# Altium PCB SoilMoistureSensorv2.PcbDoc
Units mm, origin at the board's own origin, x right, y up, seen from the top; angles counter-clockwise.
Board outline 58 x 58 mm, 2 copper layers (Top Layer, Bottom Layer); 48 components, 28 nets, 160 pads, 27 vias.
Unrouted connection lines stored in the file: 1.
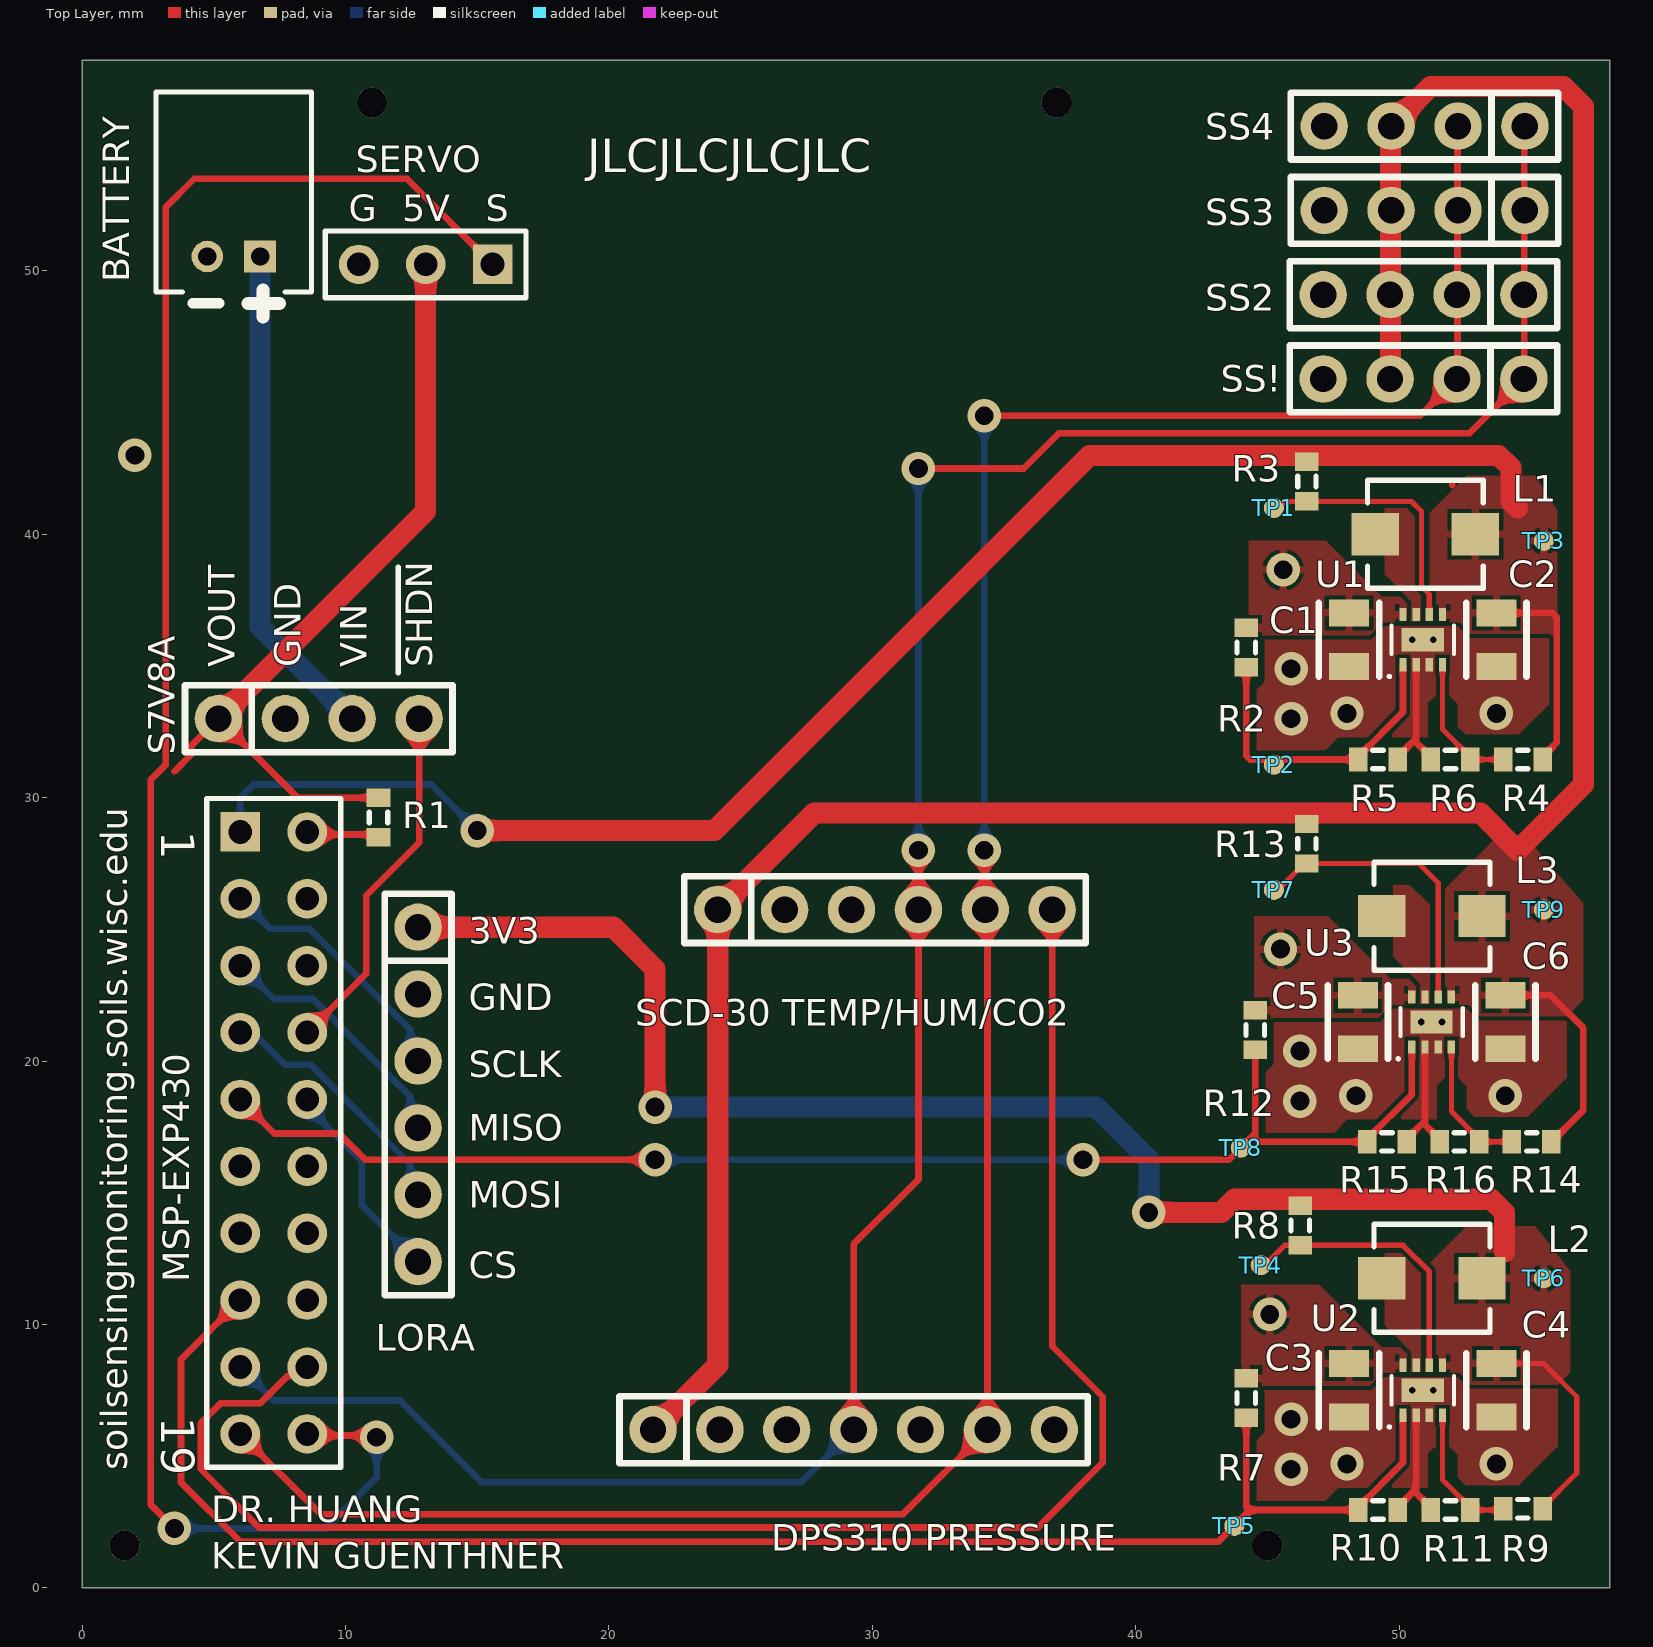
[diagram p0: Top Layer view]
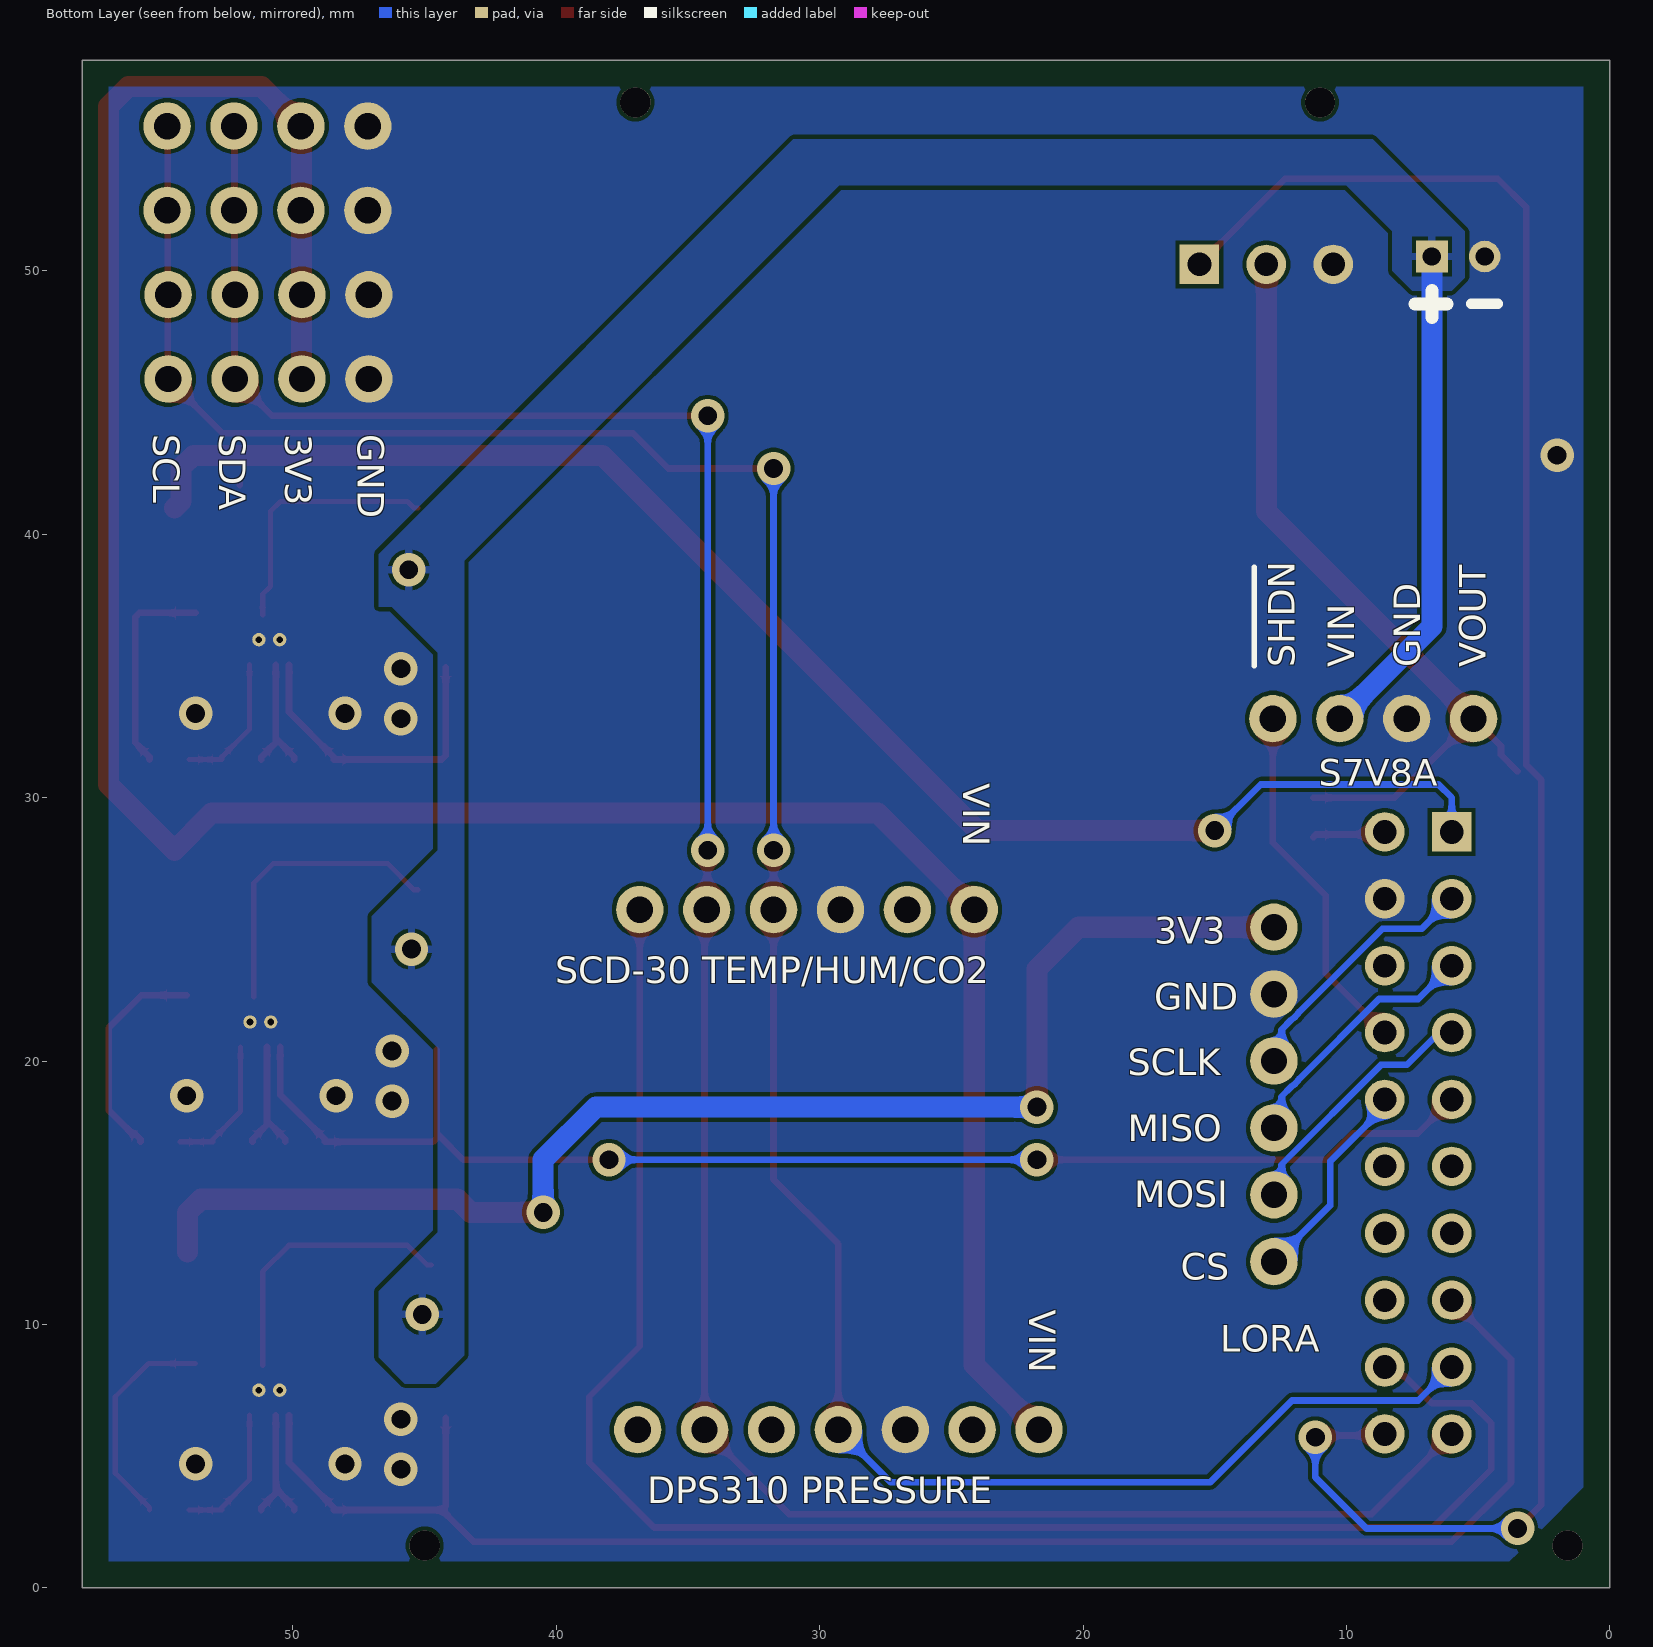
[diagram p1: Bottom Layer view, seen from below]
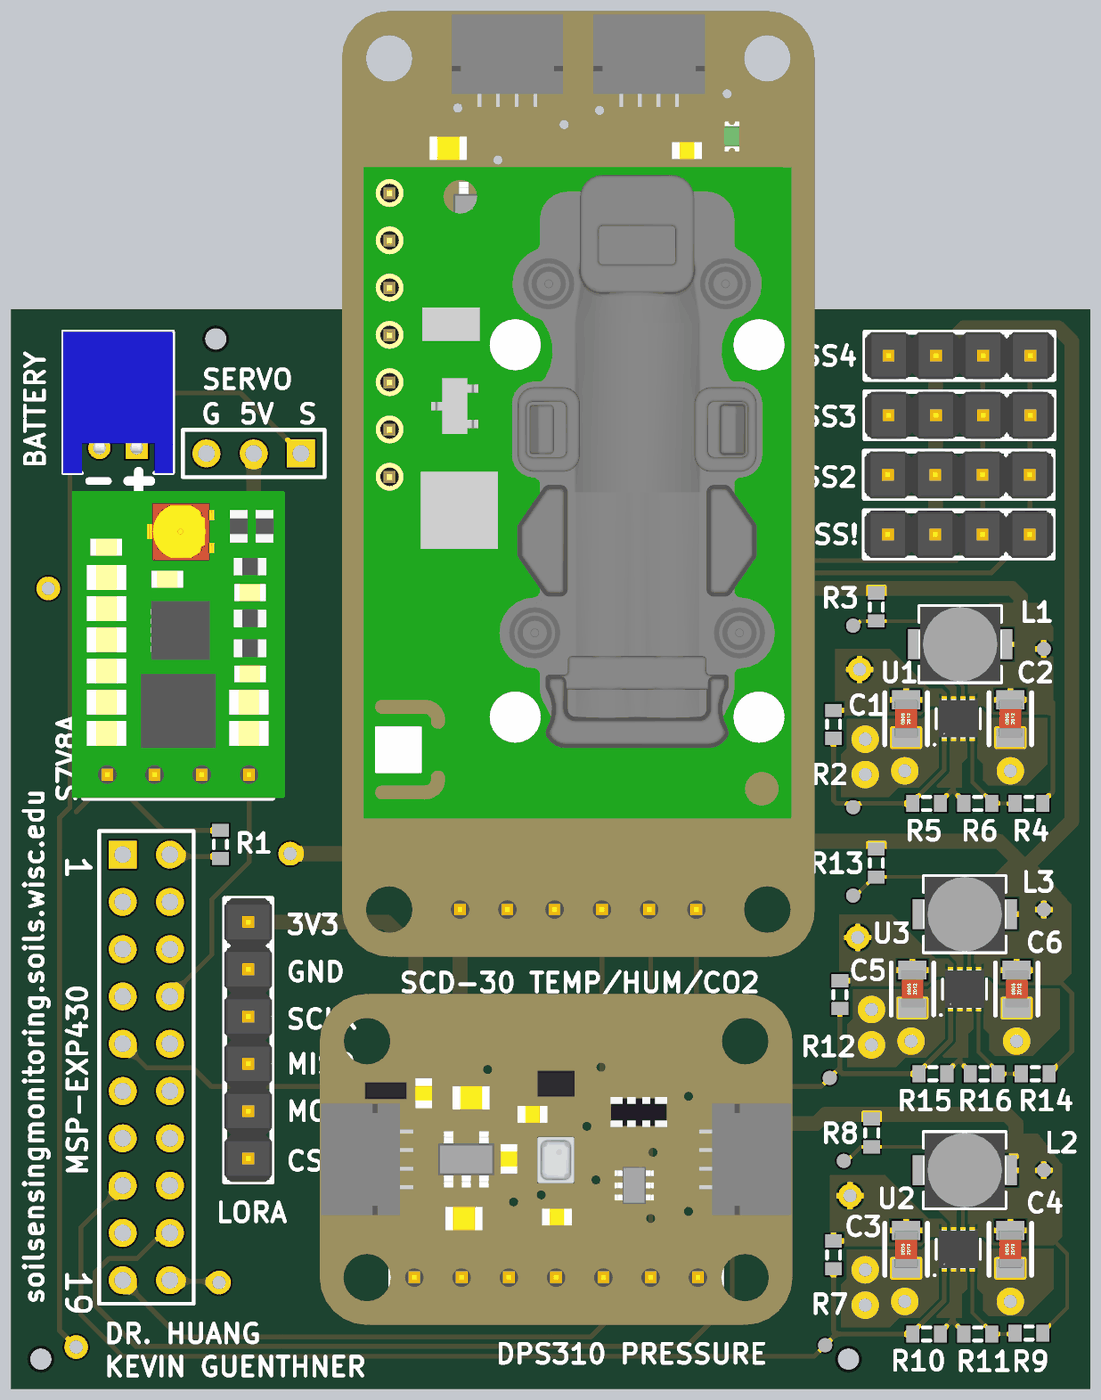
[diagram p2: 3D render of the assembled board from above, using the file's embedded part models]

## Layer stack, top to bottom
Top Solder: solder mask 0.0102, Solder Resist, Dk 3.5
Top Layer: signal copper 0.0356
Dielectric 1: dielectric 0.32, FR-4, Dk 4.8
Bottom Layer: signal copper 0.0356
Bottom Solder: solder mask 0.0102, Solder Resist, Dk 3.5

## Board outline
0,0 0,58 58,58 58,0

## Design rules (kind name [scope] priority, off if disabled: settings)
Clearance [All] p1: gap=0.152 ignorepadtopadclearanceinfootprint=FALSE
MinimumAnnularRing [All] p1: minimumring=0.127
MinimumSolderMaskSliver [All] p1: minsoldermaskwidth=0.11
PlaneClearance [All] p1: clearance=0.2
PolygonConnect PolygonConnect_2 [InNetClass('RELIEF_POWER')] p1: connectstyle=Relief reliefconductorwidth=0.3 reliefentries=4 polygonreliefangle="90 Angle" airgapwidth=0.15
PolygonConnect PolygonConnect_1 [InNetClass('POWER')] p2: connectstyle=Direct reliefconductorwidth=0.254 reliefentries=4 polygonreliefangle="90 Angle" airgapwidth=0.254
PolygonConnect [All] p3: connectstyle=Relief reliefconductorwidth=0.254 reliefentries=4 polygonreliefangle="90 Angle" airgapwidth=0.254
RoutingVias [All] p1: holewidth=0.711 width=1.27 viastyle="Through Hole" minholewidth=0.711 minwidth=1.27 maxholewidth=0.711 maxwidth=1.27
SilkToSilkClearance [All] p1: silktosilkclearance=0.125
SilkToSolderMaskClearance [IsPad] p1: minsilkscreentomaskgap=0.01 clearancetoexposedcopper=TRUE
SolderMaskExpansion [All] p1: expansion=0.102 istentingtop=FALSE
Width [All] p1: maxlimit=0.85 minlimit=0.152 preferedwidth=0.254
26 further rules are at their usual default settings.

## Classes and differential pairs
net class RELIEF_POWER: 3V3_LORA 3V3_MCU 3V3_SENSORS VBAT
net class POWER: 3V3_L_SW 3V3_M_SW 3V3_S_SW GND VBAT
component class SoilMoistureSensorv2: C1 C2 C3 C4 C5 C6 J2 J3 J9 L1 L2 L3 P1 P2 P3 P4 P6 P7 P8 R1 R2 R3 R4 R5 R6 R7 R8 R10 R11 R12 R13 R14 R15 R16 S7V8A TP9 U1 U2 U3

## Components (designator, comment, footprint, x,y, rotation, side; value= is the part's Value field where it differs from the comment)
BATTERY "Battery Connector" JST-S2B-PH-K-S_V 5.75,53 r180 top (schematic designator J2)
C1 "10µF" SMD-0805C 48.1,36 r0 top
C2 "22µF" SMD-0805C 53.7,36 r0 top
C3 "10µF" SMD-0805C 48.1,7.5 r0 top
C4 "22µF" SMD-0805C 53.7,7.5 r0 top
C5 "10µF" SMD-0805C 48.438,21.48 r0 top
C6 "22µF" SMD-0805C 54.038,21.48 r0 top
"DPS310 PRESSURE" "Header_7 - DPS310" "Pin Header DPS310" 21.67,6 r0 top (schematic designator P7)
L1 "IND 1.0uH" INDP4340X15N 51,40 r180 top value=1.0uH
L2 "IND 1.0uH" INDP4340X15N 51.25,11.75 r180 top value=1.0uH
L3 "IND 1.0uH" INDP4340X15N 51.25,25.5 r180 top value=1.0uH
LORA "Header_6 - LORA" "Pin Header LORA" 12.75,25.08 r270 top (schematic designator P8)
MSP-EXP430 "MSP_CONNECTOR_LEFT" HDR2X10 6,28.7 r270 top (schematic designator J3)
R1 "DNP" J1-0603 11.25,29.25 r270 top value=0
R2 "R10K" J1-0603 44.2,35.7 r90 top value=10k
R3 "R180K" J1-0603 46.5,42 r270 top value=180k
R4 "DNP" J1-0603 54.7,31.45 r0 top value=123
R5 "DNP" J1-0603 49.2,31.45 r180 top value=123
R6 "R_0" J1-0603 51.95,31.45 r0 top value=0
R7 "DNP" J1-0603 44.2,7.2 r90 top value=1K
R8 "R180K" J1-0603 46.25,13.75 r270 top value=180k
R9 "DNP" J1-0603 54.7,3 r0 top value=123
R10 "R10K" J1-0603 49.2,2.95 r180 top value=10k
R11 "R_0" J1-0603 51.95,2.95 r0 top value=0
R12 "DNP" J1-0603 44.538,21.18 r90 top value=123
R13 "R180K" J1-0603 46.5,28.25 r270 top value=180k
R14 "DNP" J1-0603 55.038,16.93 r0 top value=123
R15 "R10K" J1-0603 49.538,16.93 r180 top value=10k
R16 "R_0" J1-0603 52.288,16.93 r0 top value=0
S7V8A "Pololu S7V8" "Pin Header S7V8" 5.17,33 r0 top (schematic designator P5)
"SCD-30 TEMP/HUM/CO2" "Header_6 - SCD-30" "Pin Header SCD-30" 24.13,25.75 r0 top locked (schematic designator P6)
SERVO "SERVO_BUS" HDR1X3 15.58,50.25 r180 top (schematic designator J9)
SS2 "SEESAW_2" "Pin Header 1x4 TH Pitch 2.54mm" 54.74,49.1 r180 top (schematic designator P2)
SS3 "SEESAW_3" "Pin Header 1x4 TH Pitch 2.54mm" 54.78,52.3 r180 top (schematic designator P3)
SS4 "SEESAW_4" "Pin Header 1x4 TH Pitch 2.54mm" 54.78,55.5 r180 top (schematic designator P4)
SS! "SEESAW_1" "Pin Header 1x4 TH Pitch 2.54mm" 54.74,45.9 r180 top (schematic designator P1)
TP1 "TP" "Test Point" 45.25,41 r90 top
TP2 "TP" "Test Point" 45.25,31.25 r90 top
TP3 "TP" "Test Point" 55.5,39.75 r90 top
TP4 "TP" "Test Point" 44.75,12.25 r90 top
TP5 "TP" "Test Point" 43.749,2.35 r90 top
TP6 "TP" "Test Point" 55.5,11.75 r90 top
TP7 "TP" "Test Point" 45.25,26.5 r90 top
TP8 "TP" "Test Point" 43.995,16.707 r90 top
TP9 "TP" "Test Point" 55.5,25.75 r90 top
U1 "TPS62082DSGR" DSG8_1P6X0P9 50.9,36 r90 top
U2 "TPS62082DSGR" DSG8_1P6X0P9 50.9,7.5 r90 top
U3 "TPS62082DSGR" DSG8_1P6X0P9 51.238,21.48 r90 top

## Footprints (in the part's own frame and the unit in brackets; to place one, negate y for a bottom-side part, rotate by r counter-clockwise, add the part's x,y. Pads: shape width x height; smd on the part's side, far side on the other; paste and mask are expansions set on the pad)
DSG8_1P6X0P9 [mm]
  rect 0.5x0.28 smd paste-0.14 mask+0: 1(-0.95,0.75) 2(-0.95,0.25) 3(-0.95,-0.25) 4(-0.95,-0.75) 5(0.95,-0.75) 6(0.95,-0.25) 7(0.95,0.25) 8(0.95,0.75)
  rect 0.889x1.6 smd paste-0.787 mask-0.787: 9(0,0)
  round 0.508 hole 0.254: V(0,0.394) V(0,-0.394)
  Top Layer region: 0,-0.8 0,-0.8 0,-0.8 0,-0.8 0,-0.8 0,-0.8 0,-0.8 0,-0.8
  Top Layer region: 0,0.8 0,0.8 0,0.8 0,0.8 0,0.8 0,0.8 0,0.8 0,0.8
  silkscreen extent -1.45,-1.18 0.54,1.32, body extent -1.05,-1.05 1.05,1.05, height 0.54
HDR1X3 [mm] "Connector; Header; 3 Position"
  rect 1.5x1.5 hole 0.9: 1(0,0)
  round 1.5 hole 0.9: 2(2.54,0) 3(5.08,0)
  silkscreen extent -1.27,-1.27 6.35,1.27
HDR2X10 [mm] "Connector; Header; 10x2 Position"
  rect 1.5x1.5 hole 0.9: 1(0,0)
  round 1.5 hole 0.9: 2(0,2.54) 3(2.54,0) 4(2.54,2.54) 5(5.08,0) 6(5.08,2.54) 7(7.62,0) 8(7.62,2.54) 9(10.16,0) 10(10.16,2.54) 11(12.7,0) 12(12.7,2.54) 13(15.24,0) 14(15.24,2.54) 15(17.78,0) 16(17.78,2.54) 17(20.32,0) 18(20.32,2.54) 19(22.86,0) 20(22.86,2.54)
  silkscreen extent -1.27,-1.27 24.13,3.81
INDP4340X15N [mm] "Precision Wire Wound Inductor, 2-Leads, Body 4.30x4.00mm, IPC Medium Density"
  rect 1.8x1.6 smd: 1(-1.9,0) 2(1.9,0)
  silkscreen extent -2.2,-2.05 2.2,2.05, body extent -2.25,-2 2.25,2, height 1.6
J1-0603 [mm] "Chip Resistor, Body 1.6x0.8mm, IPC High Density"
  rect 0.7x0.9 smd: 1(-0.75,0) 2(0.75,0)
  silkscreen extent -0.2,-0.35 0.2,0.35, body extent -0.85,-0.48 0.85,0.48, height 0.9
JST-S2B-PH-K-S_V [mm] "THD, 2-Leads, Body 7.6x5.9mm, Pitch 2mm"
  rect 1.2x1.2 hole 0.7: 1(-1,2.45)
  round 1.2 hole 0.7: 2(1,2.45)
  silkscreen extent -2.95,-3.8 2.95,4.35, body extent -2.95,-3.8 2.95,3.8, height 4.8
"Pin Header 1x4 TH Pitch 2.54mm" [mm] "PinHeader 1x4 TH Pitch 2.54mm"
  round 1.8 hole 1: 1(0,0) 2(2.54,0) 3(5.08,0) 4(7.62,0)
  silkscreen extent -1.27,-1.27 8.89,1.27, body extent -1.27,-1.27 8.89,1.27, height 9.5
"Pin Header DPS310" [mm] "PinHeader 1x7 TH Pitch 2.54mm"
  round 1.8 hole 1: 1(0,0) 2(2.54,0) 3(5.08,0) 4(7.62,0) 5(10.16,0) 6(12.7,0) 7(15.24,0)
  silkscreen extent -1.27,-1.27 16.51,1.27, body extent -5.08,-2.56 20.32,15.22, height 7.53
"Pin Header LORA" [mm] "PinHeader 1x6 TH Pitch 2.54mm"
  round 1.8 hole 1: 1(0,0) 2(2.54,0) 3(5.08,0) 4(7.62,0) 5(10.16,0) 6(12.7,0)
  silkscreen extent -1.27,-1.27 13.97,1.27, body extent -1.27,-1.27 13.97,1.27, height 9.5
"Pin Header S7V8" [mm] "PinHeader 1x4 TH Pitch 2.54mm"
  round 1.8 hole 1: 1(0,0) 2(2.54,0) 3(5.08,0) 4(7.62,0)
  silkscreen extent -1.27,-1.27 8.89,1.27, body extent -1.91,-1.27 9.53,15.24, height 6.02
"Pin Header SCD-30" [mm] "PinHeader 1x6 TH Pitch 2.54mm"
  round 1.8 hole 1: 1(0,0) 2(2.54,0) 3(5.08,0) 4(7.62,0) 5(10.16,0) 6(12.7,0)
  silkscreen extent -1.27,-1.27 13.97,1.27, body extent -6.35,-2.54 19.05,48.26, height 11.57
SMD-0805C [mil]
  rect 60x40 smd: 1(0,40) 2(0,-40)
  silkscreen extent -45,-55 45,55, body extent -25,-39 25,39, height 35
"Test Point" [mil] "SMD Test Point"
  round 30 smd: 1(0,0)

## Part data
BATTERY: library part CMP-002-00030-2, "Male Header, Pitch 2 mm, 1 x 2 Position, Height 4.8 mm, Tail Length 3.4 mm, -25 to 85 degC, RoHS, Bulk", Case/Package=S2B-PH-K-S, Manufacturer="Japan Solderless Terminals", Max Operating Temperature=85°C, Min Operating Temperature=-25°C, Package Description="Male Header, Pitch 2 mm, 1 x 2 Position, Height 4.8 mm, Tail Length 3.4 mm", Connector Type=Header, Datasheet URL=http://www.jst-mfg.com/product/pdf/eng/ePH.pdf, Datasheet Version=Dec-12, Gender=Male, Mounting Technology=SM, Package Reference=S2B-PH-K-S, RoHS Compliant=Unknown
C1 C3 C5: library part GCJ21BR71A106KE01L, "CAP CER 10UF 10V X7R 0805", LCSC Part #=C440198, Manufacturer="Murata Electronics North America", Operating Temperature="-55°C ~ 125°C", Package / Case="0805 (2012 Metric)", Ratings=AEC-Q200, Temperature Coefficient=X7R, Tolerance=±10%, Voltage=10V, @ qty=0, Applications="Automotive, Boardflex Sensitive", Datasheets=http://www.murata.com/~/media/webrenewal/support/library/catalog/products/capacitor/mlcc/c03e.ashx, Digikey P/N=490-12646-1-ND, Factory Stock=0, Features="Soft Termination", Height - Seated (Max)=-, Image=//media.digikey.com/Renders/Murata%20Renders/0805%20(2012%20Metric)%20.85mm.jpg, Lead Spacing=-, Minimum Quantity=1, Mounting Type="Surface Mount, MLCC", Packaging="Cut Tape (CT)", Part Number=GCJ21BR71A106KE01L, Part Status=Active, Quantity Available=2702, Series=GCJ, Size / Dimension="0.079\" L x 0.049\" W (2.00mm x 1.25mm)", Thickness (Max)="0.057\" (1.45mm)", Unit Price (USD)=0.56
C2 C4 C6: library part GRT21BR61A226ME13L, "CAP CER 22UF 10V X5R 0805", LCSC Part #=C45783, Manufacturer="Murata Electronics North America", Operating Temperature="-55°C ~ 85°C", Package / Case="0805 (2012 Metric)", Ratings=AEC-Q200, Temperature Coefficient=X5R, Tolerance=±20%, Voltage=10V, @ qty=0, Applications=Automotive, Datasheets=http://search.murata.co.jp/Ceramy/image/img/A01X/G101/ENG/GRT21BR61A226ME13-01.pdf, Digikey P/N=490-12374-1-ND, Factory Stock=0, Features="Derating Recommended", Height - Seated (Max)=-, Image=//media.digikey.com/Renders/Murata%20Renders/GRT%20Series%200805(2012%20Metric).jpg, Lead Spacing=-, Lead Style=-, Minimum Quantity=1, Mounting Type="Surface Mount, MLCC", Packaging="Cut Tape (CT)", Part Number=GRT21BR61A226ME13L, Part Status=Active, Quantity Available=9088, Series=GRT, Size / Dimension="0.079\" L x 0.049\" W (2.00mm x 1.25mm)", Thickness (Max)="0.057\" (1.45mm)", Unit Price (USD)=0.58
"DPS310 PRESSURE": "Header, 7-Pin", LatestRevisionDate=17-Jul-2002, LatestRevisionNote="Re-released for DXP Platform.", Publisher="Altium Limited"
L1 L2 L3: "SLO0415S1R0MTT", Inductance=1uH, LCSC Part #=C325988, Manufacturer_Part_Number=XFL5030-102ME, Maximum DC Current=28A, Package / Case="5.48mm x 5.28mm x 3.1mm", Temperature="-40C ~ 125C", Tolerance=+-20%, Datasheet=https://www.mouser.com/datasheet/2/597/xfl5030-1223909.pdf, Height=3.1mm, Link=https://www.mouser.com/ProductDetail/Coilcraft/XFL5030-102MEB?qs=sGAEpiMZZMsg%252by3WlYCkUy0Se8nYOmwuY%252bO5URw9yeY%3d, Qualification=AEC-Q200, RefDes=RefDes, Type=DEV, Vendor=CoilCraft
LORA "SCD-30 TEMP/HUM/CO2": "Header, 6-Pin", LatestRevisionDate=17-Jul-2002, LatestRevisionNote="Re-released for DXP Platform.", Publisher="Altium Limited"
MSP-EXP430: library part "Header 10X2", "Header, 10-Pin, Dual row", LatestRevisionDate=17-Jul-2002, LatestRevisionNote="Re-released for DXP Platform.", Publisher="Altium Limited"
R1 R4 R5 R7 R9 R12 R14: library part Res3, "Resistor", LatestRevisionDate=29-May-2009, LatestRevisionNote="IPC-7351 Footprint Added.", PackageDescription="Chip Resistor", PackageReference=J1-0603, Published=8-Jun-2000, Publisher="Altium Limited"
R2 R10 R15: library part Res3, "Resistor", LCSC Part #=C25804, LatestRevisionDate=29-May-2009, LatestRevisionNote="IPC-7351 Footprint Added.", PackageDescription="Chip Resistor", PackageReference=J1-0603, Published=8-Jun-2000, Publisher="Altium Limited"
R3 R8 R13: library part Res3, "Resistor", LCSC Part #=C22827, LatestRevisionDate=29-May-2009, LatestRevisionNote="IPC-7351 Footprint Added.", PackageDescription="Chip Resistor", PackageReference=J1-0603, Published=8-Jun-2000, Publisher="Altium Limited"
R6 R11 R16: library part Res3, "Resistor", LCSC Part #=C21189, LatestRevisionDate=29-May-2009, LatestRevisionNote="IPC-7351 Footprint Added.", PackageDescription="Chip Resistor", PackageReference=J1-0603, Published=8-Jun-2000, Publisher="Altium Limited"
S7V8A: "Header, 4-Pin", LatestRevisionDate=17-Jul-2002, LatestRevisionNote="Re-released for DXP Platform.", Publisher="Altium Limited"
SERVO: library part "Header 3", "Header, 3-Pin", LatestRevisionDate=17-Jul-2002, LatestRevisionNote="Re-released for DXP Platform.", Publisher="Altium Limited"
SS2 SS3 SS4 SS!: library part "Header 4", "Header, 4-Pin", LatestRevisionDate=17-Jul-2002, LatestRevisionNote="Re-released for DXP Platform.", Publisher="Altium Limited"
TP1 TP2 TP3 TP4 TP5 TP6 TP7 TP8 TP9: "SMD TEST POINT"
U1 U2 U3: LCSC Part #=C485809

## Free pads (board coordinates)
  round 1.152 hole 1.152 unplated mask+0.148: 5(1.6,1.6) 5(11,56.4) 5(37,56.4) 5(45,1.6)

## Via types
v1: diameter 1.27, hole 0.711, Top Layer to Bottom Layer, 27 vias

## Nets (pads, with @x,y where several pads share a name; then routed paths per layer and width w, separated by ;. In a path a pad name is that pad's centre, name@x,y a point inside that pad or via, vN(x,y) a via of type N, cw(c..) or ccw(c..) an arc to the next point about the centre after c; other vN are vias at no path point)
3V3_L_FB: R9.1 R11.2 U2.4 | length 5.3
  Top Layer w0.2: U2.4 51.65,4.1 52.7,3.05 R11.2 R9.1@53.95,2.95
3V3_L_SW: L2.2 U2.7
3V3_LORA: C4.1 L2.1 LORA.1 R8.1 R9.2 TP6.1 U2.5 | length 60.3
  Top Layer w0.2: C4.1 55.484,8.516 56.75,7.25 56.75,4.35 55.45,3.05 R9.2@55.45,2.95
  Top Layer w0.8: LORA.1 20.17,25.08 21.75,23.5 v1(21.75,18.25) ; v1(40.5,14.25) 43.25,14.25 43.75,14.75 45.75,14.75 53.5,14.75 54,14.25 54,12.75
  Bottom Layer w0.8: v1(21.75,18.25) 38.5,18.25 40.5,16.25 v1(40.5,14.25)
3V3_LORA_EN: MSP-EXP430.15 R7.1 R10.2 TP5.1 U2.1 | length 61.7
  Top Layer w0.254: MSP-EXP430.15 3.75,8.67 3.75,4 6,1.75 43.149,1.75 44.349,2.95 ; R7.1 44.2,3.099 44.349,2.95 ; R10.2 44.349,2.95 ; R10.2@48.45,3.05 50.15,4.75 U2.1
3V3_LORA_PGOOD: R8.2 TP4.1 U2.6 | length 10.7
  Top Layer w0.2: TP4.1 44.9,12.25 45.65,13 45.75,13 50.157,13 51.15,12.007 U2.6
3V3_M_SW: L1.2 U1.7
3V3_M_VFB: R4.1 R6.2 U1.4 | length 5.3
  Top Layer w0.2: U1.4 51.65,32.6 52.7,31.55 R6.2 R4.1
3V3_MCU: C2.1 L1.1 MSP-EXP430.1 R3.1 R4.2 TP3.1 U1.5 | length 66.3
  Top Layer w0.254: 52.025,41.875 52.025,41.975 ; C2.1 55.835,37.016 55.984,36.867 55.984,32.084 55.45,31.55 R4.2
  Top Layer w0.8: v1(15,28.75) 24,28.75 38.25,43 53.781,43 54.25,42.531 54.25,41.25 54.5,41
  Bottom Layer w0.254: MSP-EXP430.1 6,30 6.5,30.5 13.25,30.5 v1(15,28.75)
3V3_MCU_EN: R2.1 R5.2 TP2.1 U1.1 | length 11.9
  Top Layer w0.254: R2.1 44.2,31.599 44.349,31.45 R5.2 ; R5.2@48.45,31.55 50.15,33.25 U1.1
3V3_MCU_PGOOD: R3.2 TP1.1 U1.6 | length 9.9
  Top Layer w0.2: TP1.1 45.398,41 45.648,41.25 R3.2 50.475,41.25 50.85,40.875 50.85,38.025 51.15,37.725 U1.6
3V3_S_FB: R14.1 R16.2 U3.4 | length 5.3
  Top Layer w0.2: U3.4 51.988,18.08 53.038,17.03 R16.2 R14.1
3V3_S_SW: L3.2 U3.7
3V3_SENSORS: "DPS310 PRESSURE.1" "SCD-30 TEMP/HUM/CO2.1" C6.1 L3.1 R13.1 R14.2 SS2.3 SS3.3 SS4.3 SS!.3 TP9.1 U3.5 | length 108.7
  Top Layer w0.254: C6.1 55.754,22.496 57,21.25 57,18.142 56.111,17.253 56.011,17.253 55.788,17.03 R14.2
  Top Layer w0.8: 21.67,6 24.13,8.46 24.13,25.75 27.794,29.414 44.25,29.414 53.086,29.414 54.5,28 57,30.5 57,56.25 56.25,57 51.2,57 SS4.3 49.68,55.48 49.68,52.3 49.68,49.1 49.68,45.92 SS!.3
3V3_SENSORS_EN: MSP-EXP430.9 R12.1 R15.2 TP8.1 U3.1 | length 51.8
  Top Layer w0.254: MSP-EXP430.9 7.29,17.25 9.75,17.25 10.75,16.25 v1(21.75,16.25) ; v1(38,16.25) 43.538,16.25 44.453,17.164 44.538,17.25 ; R12.1 44.538,17.25 ; R15.2 44.687,16.93 44.538,17.079 44.538,17.25 ; R15.2@48.788,17.03 50.488,18.73 U3.1
  Bottom Layer w0.254: v1(21.75,16.25) v1(38,16.25)
3V3_SENSORS_PGOOD: R13.2 TP7.1 U3.6 | length 11.3
  Top Layer w0.2: TP7.1 45.4,26.5 46.4,27.5 R13.2 50.75,27.5 51.488,26.762 U3.6
5V: R1.1 S7V8A.1 SERVO.2 | length 30.5
  Top Layer w0.254: 3.5,31 4.131,31.631 4.131,31.961 S7V8A.1 8.17,30 R1.1
  Top Layer w0.8: S7V8A.1 13.04,40.87 SERVO.2
CS: LORA.6 MSP-EXP430.10 | length 7.9
  Bottom Layer w0.254: MSP-EXP430.10 8.54,18.257 10.616,16.181 10.616,14.514 LORA.6
GND: "DPS310 PRESSURE.3" "SCD-30 TEMP/HUM/CO2.3" BATTERY.2 C1.2 C2.2 C3.2 C4.2 C5.2 C6.2 LORA.2 MSP-EXP430.4 R5.1 R6.1 R10.1 R11.1 R15.1 R16.1 S7V8A.2 SERVO.3 SS2.4 SS3.4 SS4.4 SS!.4 U1.2 U1.3 U1.9 U1.V U2.2 U2.3 U2.9 U2.V U3.2 U3.3 U3.9 U3.V | length 14.8
  Top Layer w0.254: R10.1 49.95,3.05 50.65,3.75 ; R5.1 49.95,31.55 50.65,32.25 ; R15.1 50.288,17.03 50.988,17.73 ; U2.2 50.65,3.75 ; U1.2 50.65,32.25 ; U3.2 50.988,17.73 ; R11.1 51.2,3.05 50.65,3.6 50.65,3.75 ; R6.1 51.2,31.55 50.65,32.1 50.65,32.25 ; R16.1 51.538,17.03 50.988,17.58 50.988,17.73
  other v1: 45.9,4.5 48.025,4.7 53.7,4.7 45.9,6.4 46.238,18.48 48.363,18.68 54.038,18.68 46.238,20.38 45.9,33 48.025,33.2 53.7,33.2 45.9,34.9 2,43
MISO: LORA.4 MSP-EXP430.5 | length 9.8
  Bottom Layer w0.254: MSP-EXP430.5 7.268,22.352 8.763,22.352 11.768,19.347 ccw(c12.75,20) 12.097,19.018 12.454,18.661 12.454,17.756 LORA.4
MOSI: LORA.5 MSP-EXP430.7 | length 9.8
  Bottom Layer w0.254: MSP-EXP430.7 6.238,20.842 6.717,20.842 7.705,19.854 8.682,19.854 12.454,16.082 12.454,15.216 LORA.5
NetJ3_2: MSP-EXP430.2 R1.2 | length 2.8
  Top Layer w0.254: MSP-EXP430.2 8.64,28.6 11.15,28.6 R1.2
SCD30_RDY: "SCD-30 TEMP/HUM/CO2.6" MSP-EXP430.18 | length 64.7
  Top Layer w0.254: MSP-EXP430.18 8.203,8.38 7.862,8.039 7.789,8.039 6.75,7 5.25,7 4.5,6.25 4.5,4.5 6.714,2.286 36.286,2.286 38.75,4.75 38.75,7.25 36.83,9.17 36.83,25.75
SCL: "DPS310 PRESSURE.4" "SCD-30 TEMP/HUM/CO2.4" MSP-EXP430.17 SS2.1 SS3.1 SS4.1 SS!.1 | length 97.5
  Top Layer w0.254: 29.29,6 29.29,13.045 31.75,15.505 v1(31.75,28) ; v1(31.75,42.5) 35.75,42.5 37.086,43.836 52.676,43.836 54.76,45.92 54.76,55.48 SS4.1
  Bottom Layer w0.254: MSP-EXP430.17 7.268,7.112 12.065,7.112 15.177,4 27.29,4 29.29,6 ; v1(31.75,28) v1(31.75,42.5)
SCLK: LORA.3 MSP-EXP430.3 | length 9.8
  Bottom Layer w0.254: MSP-EXP430.3 7.141,25.019 8.636,25.019 11.768,21.887 ccw(c12.75,22.54) 12.097,21.558 12.454,21.201 12.454,20.296 LORA.3
SDA: "DPS310 PRESSURE.6" "SCD-30 TEMP/HUM/CO2.5" MSP-EXP430.19 SS2.2 SS3.2 SS4.2 SS!.2 | length 97.7
  Top Layer w0.254: MSP-EXP430.19 9.046,2.794 31.164,2.794 34.37,6 34.37,25.67 34.29,25.75 34.27,25.77 34.27,27.98 v1(34.25,28) ; v1(34.25,44.5) 50.8,44.5 SS!.2 52.22,45.92 52.22,49.1 52.22,55.48 SS4.2
  Bottom Layer w0.254: v1(34.25,28) v1(34.25,44.5)
SERVO_GPIO_EN: MSP-EXP430.8 S7V8A.4 | length 13.7
  Top Layer w0.254: MSP-EXP430.8 10.784,23.324 10.784,26.284 12.79,28.29 S7V8A.4
SERVO_PWM: MSP-EXP430.20 SERVO.1 | length 77.7
  Top Layer w0.254: v1(3.5,2.25) 2.595,3.155 2.595,30.67 3.164,31.239 3.164,52.414 4.25,53.5 12.33,53.5 SERVO.1 ; MSP-EXP430.20 8.602,5.778 11.113,5.778 v1(11.176,5.715)
  Bottom Layer w0.254: v1(3.5,2.25) 9.235,2.25 11.176,4.191 v1(11.176,5.715)
VBAT: BATTERY.1 C1.1 C3.1 C5.1 R2.2 R7.2 R12.2 S7V8A.3 U1.8 U2.8 U3.8 | length 19
  Bottom Layer w0.8: BATTERY.1 6.75,45.25 6.75,36.5 S7V8A.3
  other v1: 45.086,10.379 45.5,24.25 45.6,38.65
pads on no net: "DPS310 PRESSURE.2" "DPS310 PRESSURE.5" "DPS310 PRESSURE.7" "SCD-30 TEMP/HUM/CO2.2" MSP-EXP430.6 MSP-EXP430.11 MSP-EXP430.12 MSP-EXP430.13 MSP-EXP430.14 MSP-EXP430.16

## Polygon pours and split planes (outlines as drawn)
VBAT on Bottom Layer "VBAT_BOT" (solid, pour order 0): 45.75,7.75 46.75,8.75 46.75,11.25 44.5,13.5 44.5,20.5 47,23 47,25.5 44.5,28 44.5,35.5 46.25,37.25 46.75,37.25 46.75,39.25 31,55 9,55 5.5,51.5 5.5,49.75 6,49.25 7.5,49.25 8.25,50 8.25,51.5 10,53.25 29.25,53.25 43.5,39 43.5,8.825 44.575,7.75
GND on Bottom Layer "GND_L02_P015" (solid, pour order 15): 1,3.81 3.81,1 57,1 57,57 1,57
VBAT on Top Layer "VBAT" (solid, pour order 3): 50.037,9.137 50.338,8.838 50.338,8.388 49.5,7.55 44,7.55 44,11.5 46.975,11.5 49.338,9.138
GND on Top Layer "PS_GND" (solid, pour order 11): 52.225,32.7 52.525,32.4 54.55,32.4 56.025,33.875 56.025,36.05 52.675,36.05 52.225,36.5 49.45,36.5 48.95,36 44.9,36 44.9,34.4 44.6,34.1 44.6,31.8 47.2,31.8 47.7,32.3 51.1,32.3 51.1,33.6 51.393,33.875 51.907,33.875 52.225,33.557
VBAT on Top Layer "VBAT" (solid, pour order 12): 50.037,37.637 50.338,37.338 50.338,36.888 49.5,36.05 44.288,36.05 44.288,39.75 47.225,39.75 49.338,37.638
3V3_MCU on Top Layer "3V3_LORA" (solid, pour order 14): 51.175,40.825 51.175,37.15 52.15,36.175 56,36.175 56,40.901 55.175,42.225 52.575,42.225
3V3_M_SW on Top Layer "3V3_L_SW" (solid, pour order 13): 50.45,36.7 50.45,37.475 49.45,38.475 49.45,41.2 50.075,41.2 50.825,40.45 50.825,36.7
3V3_SENSORS on Top Layer "3V3_LORA" (solid, pour order 10): 51.513,26.305 51.513,22.63 52.488,21.655 56.338,21.655 57,22.317 57,25.742 57,26 54.82,28.5 53.708,28.5
3V3_S_SW on Top Layer "3V3_L_SW" (solid, pour order 9): 50.788,22.18 50.788,22.955 49.788,23.955 49.788,26.68 50.413,26.68 51.163,25.93 51.163,22.18
VBAT on Top Layer "VBAT" (solid, pour order 8): 50.376,23.118 50.676,22.818 50.676,22.368 49.838,21.53 44.5,21.53 44.5,25.5 47.293,25.5 49.676,23.118
GND on Top Layer "PS_GND" (solid, pour order 7): 52.563,18.18 52.863,17.88 54.888,17.88 56.363,19.355 56.363,21.53 53.013,21.53 52.563,21.98 49.788,21.98 49.288,21.48 45.238,21.48 45.238,19.88 44.938,19.58 44.938,17.28 47.538,17.28 48.038,17.78 51.438,17.78 51.438,19.08 51.731,19.355 52.246,19.355 52.563,19.038
GND on Top Layer "PS_GND" (solid, pour order 2): 52.225,4.2 52.525,3.9 54.55,3.9 56.025,5.375 56.025,7.55 52.675,7.55 52.225,8 49.45,8 48.95,7.5 44.9,7.5 44.9,5.9 44.6,5.6 44.6,3.3 47.2,3.3 47.7,3.8 51.1,3.8 51.1,5.1 51.393,5.375 51.907,5.375 52.225,5.057
3V3_LORA on Top Layer "3V3_LORA" (solid, pour order 6): 51.175,12.325 51.175,8.65 52.15,7.675 56,7.675 56.5,8.175 56.5,11.6 56.5,12.025 55.175,13.725 52.575,13.725
3V3_L_SW on Top Layer "3V3_L_SW" (solid, pour order 4): 50.45,8.2 50.45,8.975 49.45,9.975 49.45,12.7 50.075,12.7 50.825,11.95 50.825,8.2

## Silkscreen, mask and mechanical layers (free items; w line width, h text height)
Top Overlay:
  lines w0.203: 12,34.75 12,38.75
  lines w0.4: 4.191,48.768 5.207,48.768
  lines w0.5: 6.286,48.768 7.493,48.768 ; 6.858,48.26 6.858,49.276
  text "JLCJLCJLCJLC" at 19.179,53.754 h1.27
  text "G" at 10.109,51.892 h1.02
  text "5V" at 12.141,51.892 h1.02
  text "S" at 15.316,51.892 h1.02
  text "VOUT" at 5.797,34.953 h1.02 r90
  text "GND" at 8.297,34.953 h1.02 r90
  text "VIN" at 10.797,34.953 h1.02 r90
  text "SHDN" at 13.297,34.953 h1.02 r90
  text "3V3" at 14.681,24.46 h1.02
  text "GND" at 14.681,21.92 h1.02
  text "SCLK" at 14.681,19.38 h1.02
  text "MISO" at 14.681,16.967 h1.02
  text "MOSI" at 14.681,14.427 h1.02
  text "CS" at 14.681,11.76 h1.02
  text "soilsensingmonitoring.soils.wisc.edu" at 1.708,4.453 h1.02 r90
  text "DR. HUANG" at 4.902,2.489 h1.02
  text "KEVIN GUENTHNER" at 4.902,0.711 h1.02
Bottom Overlay:
  lines w0.203: 13.5,35 13.5,38.75
  lines w0.4: 4.25,48.75 5.266,48.75
  lines w0.5: 6.178,48.75 7.385,48.75 ; 6.75,48.242 6.75,49.258
  text "GND" at 47.547,43.797 h1.02 r90
  text "3V3" at 50.297,43.797 h1.02 r90
  text "SDA" at 52.797,43.797 h1.02 r90
  text "SCL" at 55.297,43.797 h1.02 r90
  text "VOUT" at 4.703,34.953 h1.02 r270
  text "GND" at 7.203,34.953 h1.02 r270
  text "VIN" at 9.703,34.953 h1.02 r270
  text "SHDN" at 11.953,34.953 h1.02 r270
  text "VIN" at 24.547,30.547 h1.02 r90
  text "S7V8A" at 11.047,30.453 h1.02
  text "3V3" at 17.297,24.453 h1.02
  text "SCD-30 TEMP/HUM/CO2" at 40.047,22.953 h1.02
  text "GND" at 17.297,21.953 h1.02
  text "SCLK" at 18.297,19.453 h1.02
  text "MISO" at 18.297,16.953 h1.02
  text "MOSI" at 18.047,14.453 h1.02
  text "CS" at 16.297,11.703 h1.02
  text "VIN" at 22.047,10.547 h1.02 r90
  text "LORA" at 14.797,8.953 h1.02
  text "DPS310 PRESSURE" at 36.547,3.203 h1.02
Mechanical 1:
  the board outline again, w0.254

## Text inside footprints (layer, text, board x,y; h text height)
MSP-EXP430: Top Overlay "1" at 3,28.75 h1.27 r270; Top Overlay "19" at 3,6.5 h1.27 r270